# Altium PCB praline.PcbDoc (part 8 of 8)
Units mm, origin at the board's own origin, x right, y up, seen from the top; angles counter-clockwise.
Board outline 152.4 x 101.6 mm, 6 copper layers (In2.Cu, F.Cu, B.Cu, In1.Cu, In3.Cu, In4.Cu); 581 components, 490 nets, 2812 pads, 953 vias.
Unrouted connection lines stored in the file: 404.
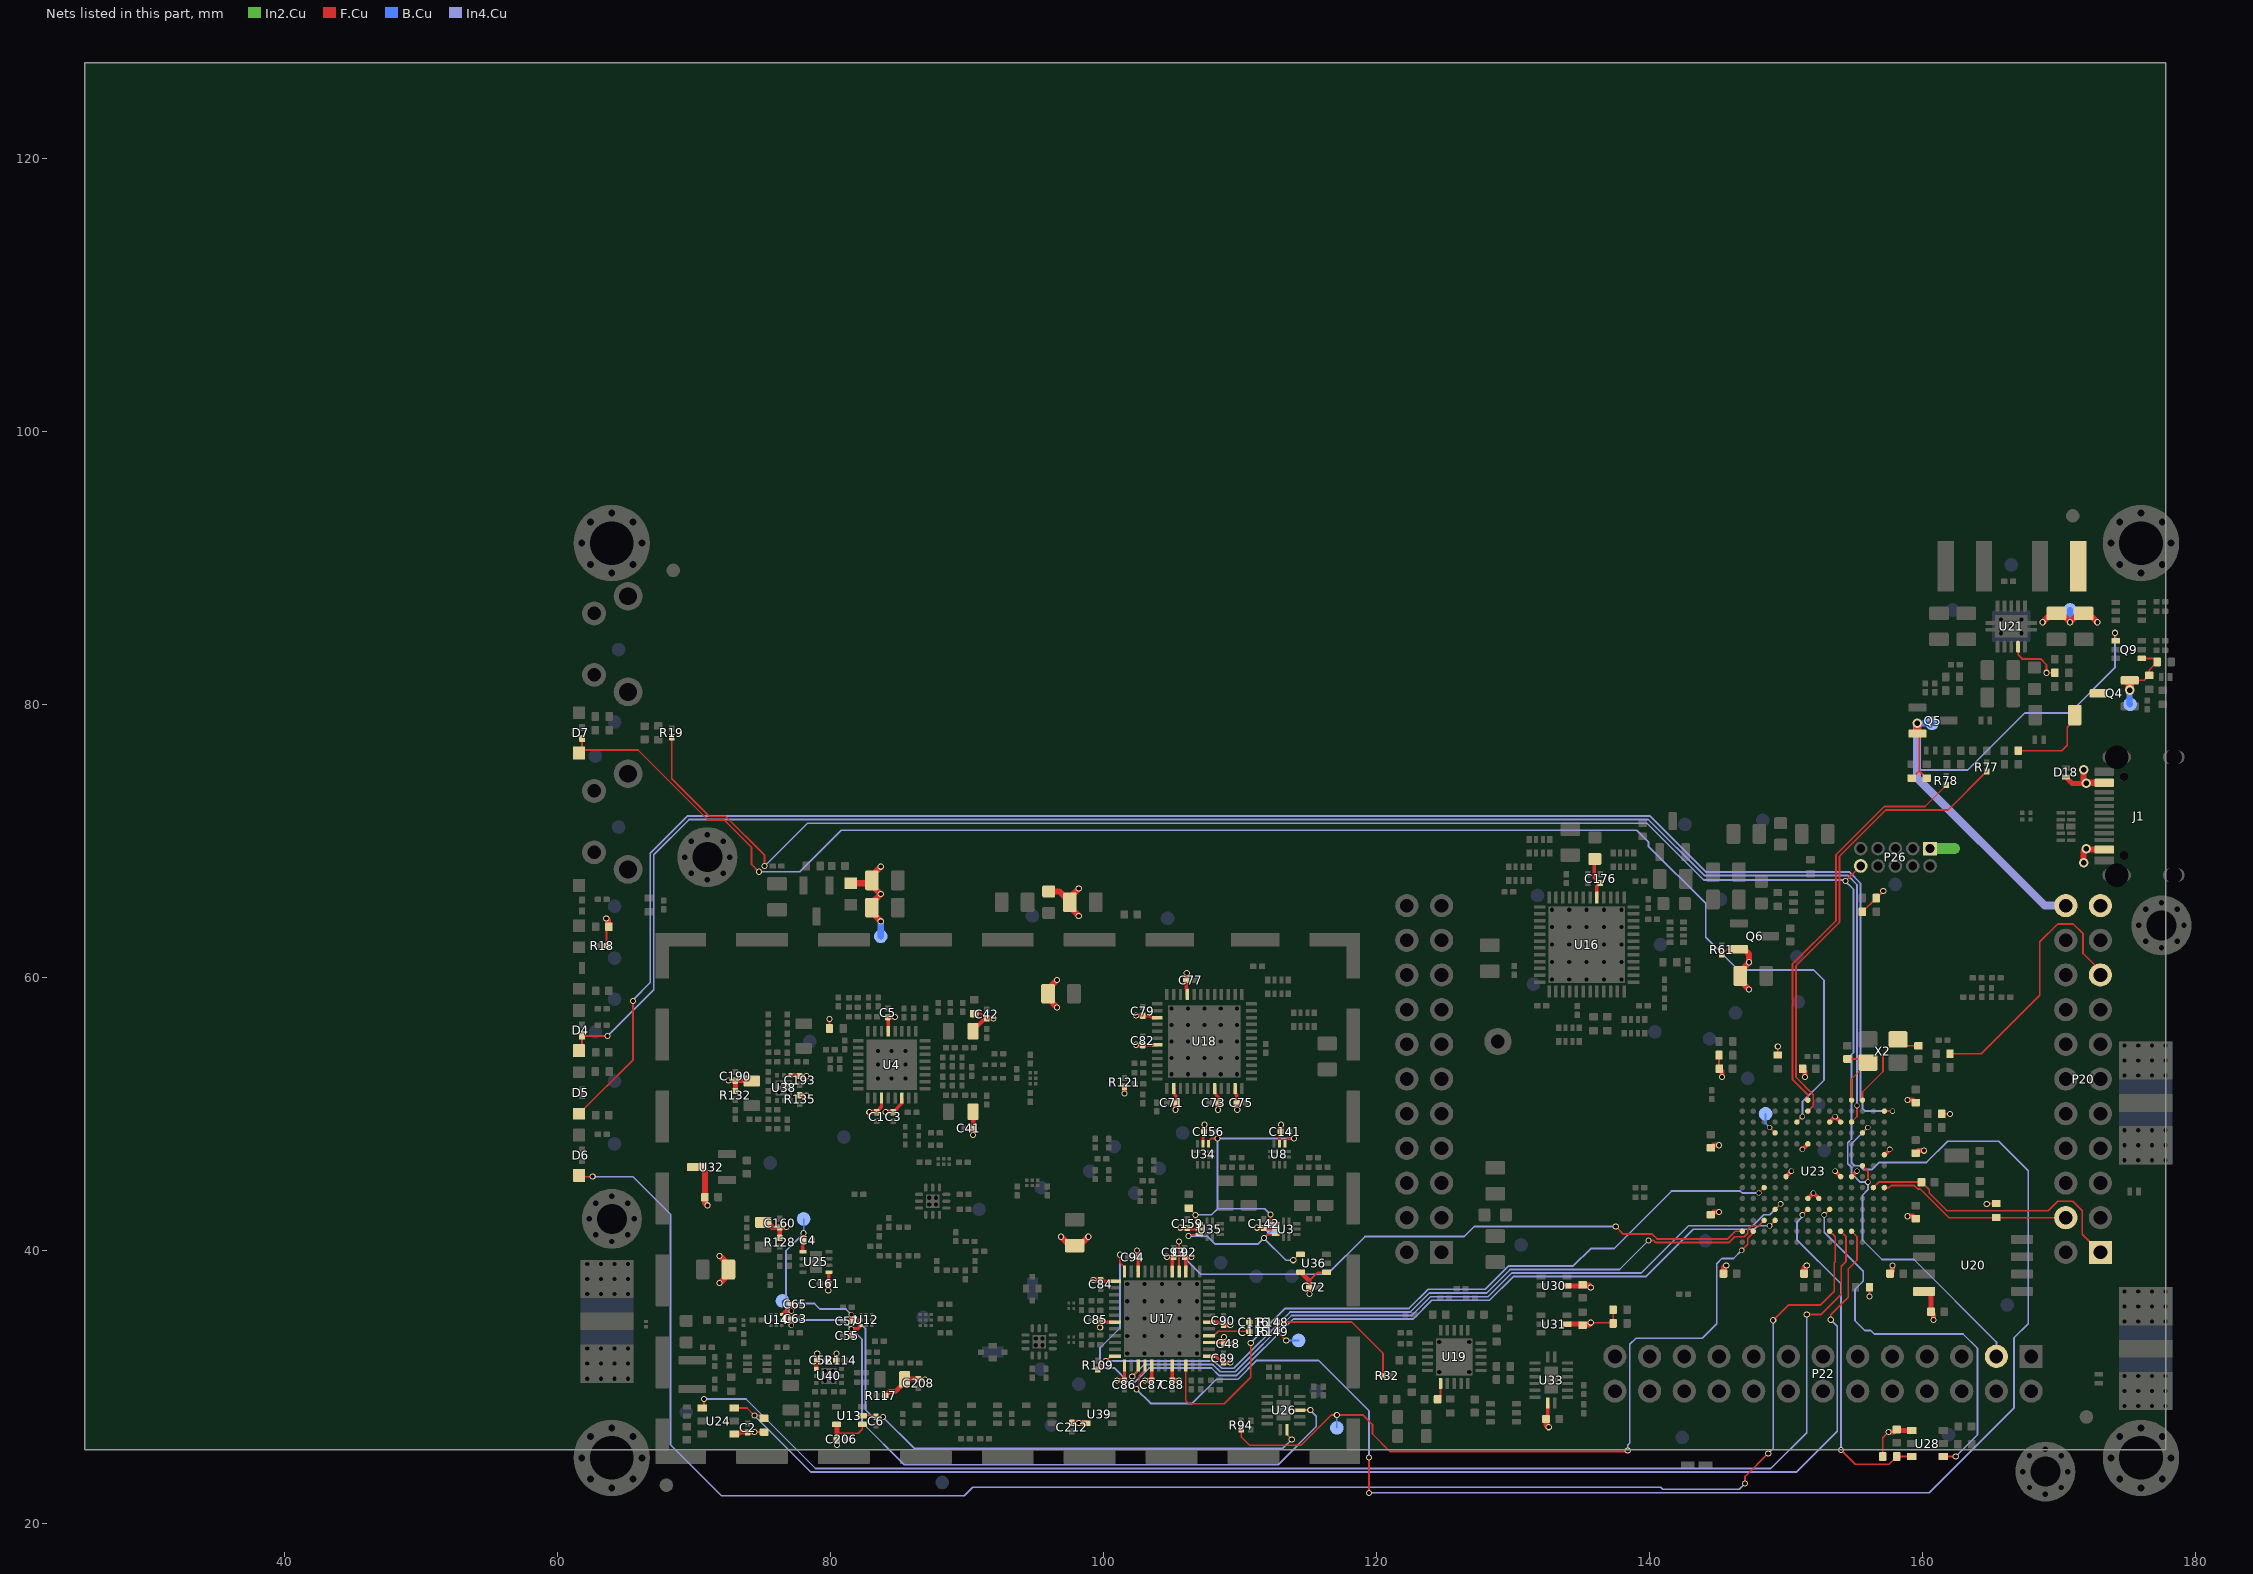
[diagram p10: the nets of this part, all layers, seen from the top]

## Via types
v1: diameter 0.45, hole 0.3, F.Cu to B.Cu, tented both sides, 751 vias
v2: diameter 0.4, hole 0.3, F.Cu to B.Cu, tented both sides, 119 vias
v3: diameter 0.7, hole 0.4, F.Cu to B.Cu, tented both sides, 83 vias

## Nets (pads, with @x,y where several pads share a name; then routed paths per layer and width w, separated by ;. In a path a pad name is that pad's centre, name@x,y a point inside that pad or via, vN(x,y) a via of type N, cw(c..) or ccw(c..) an arc to the next point about the centre after c; other vN are vias at no path point) (continued)
VAA: C1.1 C2.1 C3.1 C5.1 C22.1 C41.1 C42.1 C48.1 C52.1 C71.1 C72.1 C73.1 C75.1 C77.1 C79.1 C82.1 C84.1 C85.1 C86.1 C87.1 C88.1 C89.1 C90.1 C92.1 C93.1 C94.1 C105.1 C141.1 C142.1 C154.1 C156.1 C159.1 C160.1 C161.1 C162.1 C190.1 C193.1 C200.1 C201.1 C204.1 C206.1 C208.1 C212.1 FB3.2 L2.1 L5.1 L26.1 L27.1 L29.1 R5.1 R18.2 R36.2 R114.2 R117.2 R120.1 R121.1 R128.2 R132.2 R135.2 TP4.1 U3.9 U4.5 U4.19 U4.22 U8.9 U13.1 U13.5 U17.1 U17.7 U17.13 U17.17 U17.20 U17.25 U17.27 U17.30 U17.39 U17.41 U17.46 U18.2 U18.8 U18.11 U18.33 U18.39 U18.43 U24.1 U25.1 U32.3 U34.9 U35.9 U36.1 U36.5 U38.1 U39.5 U40.1 | length 89.3
  F.Cu w0.127: R18.2@63.62,62.32 63.62,63.56 C162.1@63.78,63.72 ; v1(74.45,26.72) 75.14,26.72 R36.2@75.15,26.71 ; R120.1@79.94,56.27 79.94,56.96 v1(79.95,56.97) ; 80.48,26.62 82.05,26.62 82.35,26.92 U13.1@82.35,27.27 ; R5.1@90.55,57.36 91.05,57.36 91.41,57 C42.1@91.45,57 ; 115.08,37.79 115.71,38.42 U36.1@116.35,38.42
  F.Cu w0.2: C94.1@102.47,39.52 C94.1@102.57,39.62
  F.Cu w0.203: C159.1@106.15,41.65 106.23,41.57 U35.9@107.032,41.57 ; U34.9@107.3,47.838 C156.1@107.3,48.6 ; C142.1@111.75,41.65 111.83,41.57 U3.9@112.631,41.57 ; U8.9@112.9,47.838 C141.1@112.9,48.6
  F.Cu w0.25: C161.1@79.87,37.57 79.9,37.6 U25.1@79.9,38.42 ; C1.1@83.4,50.14 83.4,50.17 83.75,50.52 U4.19@83.75,51.17 ; C5.1@84.2,57.1 84.25,57.05 U4.5@84.25,56.07 ; C3.1@84.6,50.14 85.25,50.79 U4.22@85.25,51.17 ; C85.1@99.77,34.92 99.92,34.77 U17.7@100.863,34.77 ; C84.1@99.8,37.84 99.87,37.77 U17.1@100.863,37.77 ; C86.1@101.55,30.49 U17.13@101.55,31.582 ; C94.1@102.47,39.52 102.55,39.44 U17.46@102.55,38.457 ; C79.1@102.9,57.2 103.44,57.2 103.57,57.07 U18.39@103.95,57.07 ; C82.1@102.93,55.02 C82.1@102.9,55.05 102.92,55.07 U18.43@103.95,55.07 ; C87.1@103.55,30.49 U17.17@103.55,31.582 ; C88.1@105.05,30.49 U17.20@105.05,31.582 ; U17.41@105.05,38.457 105.05,39.45 C93.1@105.15,39.55 ; U18.2@105.15,51.87 105.15,51.523 105.32,51.353 C71.1@105.32,50.82 ; C92.1@105.95,39.55 106.05,39.45 U17.39@106.05,38.457 ; C77.1@106.08,59.82 106.08,59.21 106.15,59.14 U18.33@106.15,58.77 ; U17.25@107.737,32.27 108.24,32.27 108.71,31.8 C89.1@108.8,31.8 ; U17.27@107.737,33.27 108.73,33.27 C48.1@108.83,33.17 ; U17.30@107.737,34.77 108.48,34.77 108.7,34.55 C90.1@108.8,34.55 ; U18.8@108.15,51.87 108.15,51.52 108.42,51.25 C73.1@108.42,50.82 ; U18.11@109.65,51.87 109.65,51.53 109.78,51.4 C75.1@109.78,50.82
  F.Cu w0.3: U38.1@77.1,52.845 77.695,52.845 C193.1@77.75,52.79 ; U40.1@78.975,31.32 78.975,31.915 C52.1@79.03,31.97 ; L29.1@90.45,50.17 90.47,50.15 C41.1@90.47,48.97 ; L2.1@90.45,56.07 90.45,56.12 91.33,57 C42.1@91.45,57
  F.Cu w0.35: v1@98.25,27.37 U39.5@98.75,27.37 ; v1(102.4,55.08) 102.43,55.05 C82.1@102.9,55.05 ; v1(102.4,57.23) 102.43,57.2 C79.1@102.9,57.2 ; v1(105.29,50.32) 105.32,50.35 C71.1@105.32,50.82 ; C77.1@106.08,59.82 106.08,60.29 v1(106.11,60.32) ; v1(108.39,50.32) 108.42,50.35 C73.1@108.42,50.82 ; C75.1@109.78,50.82 109.78,50.35 v1(109.81,50.32)
  F.Cu w0.364: v1(72.55,52.47) 73.03,52.47 C190.1@73.05,52.45 ; U24.1@72.96,26.57 73.25,26.57 73.38,26.7 C2.1@73.95,26.7 73.97,26.72 v1(74.45,26.72) ; R132.2@73.05,51.69 C190.1@73.05,52.45 ; L27.1@74.25,52.42 74.22,52.45 C190.1@73.05,52.45 ; L26.1@75.1,42.07 75.4,42.07 75.77,41.7 C160.1@76.3,41.7 ; R128.2@76.3,40.94 C160.1@76.3,41.7 ; v1(76.8,41.72) 76.32,41.72 C160.1@76.3,41.7 ; R135.2@77.75,51.39 77.77,51.37 v1(78.25,51.37) ; C193.1@77.75,52.79 77.77,52.77 v1(78.25,52.77) ; C52.1@79.03,31.97 79.05,31.99 v1(79.05,32.47) ; v1(79.85,37.07) 79.85,37.55 C161.1@79.87,37.57 ; R114.2@80.43,31.97 80.45,31.99 v1(80.45,32.47) ; U13.5@80.45,27.27 80.48,27.24 80.48,26.62 C206.1@80.48,26.17 80.5,26.15 v1(80.5,25.77) ; v1(82.86,50.14) C1.1@83.4,50.14 ; R117.2@84.02,29.37 84.32,29.67 84.75,29.67 85.45,30.37 L5.1@85.45,30.57 85.47,30.59 C208.1@86.45,30.59 86.47,30.57 v1(86.95,30.57) ; v1(84.06,50.14) C3.1@84.6,50.14 ; C5.1@84.2,57.1 v1(84.74,57.1) ; v1(90.45,48.47) 90.45,48.95 C41.1@90.47,48.97 ; C42.1@91.45,57 91.47,57.02 v1(91.95,57.02) ; C212.1@97.7,27.39 97.72,27.37 v1(98.2,27.37) ; v1(99.26,37.84) C84.1@99.8,37.84 ; v1(99.77,34.38) C85.1@99.77,34.92 ; v1(101.01,30.49) C86.1@101.55,30.49 ; v1(101.55,51.5) R121.1@101.55,52 ; C94.1@102.47,39.52 v1(102.47,40.02) ; v1(103.05,30.49) C87.1@103.55,30.49 ; v1(104.65,39.55) C93.1@105.15,39.55 ; C88.1@105.05,30.49 v1(105.55,30.49) ; v1(105.65,41.68) 106.12,41.68 C159.1@106.15,41.65 ; C92.1@105.95,39.55 v1(106.45,39.55) ; C156.1@107.38,48.72 107.41,48.75 v1(107.41,49.22) ; C89.1@108.8,31.8 v1(109.3,31.8) ; C90.1@108.8,34.55 v1(109.3,34.55) ; C48.1@108.83,33.17 v1(108.83,33.67) ; v1(111.25,41.68) 111.72,41.68 C142.1@111.75,41.65 ; C141.1@112.98,48.72 113.01,48.75 v1(113.01,49.22) ; U36.5@114.45,38.42 115.08,37.79 C72.1@115.08,37.32 115.11,37.29 v1(115.11,36.82)
  F.Cu w0.45: v1(63.59,64.32) 63.73,64.18 63.73,63.77 C162.1@63.78,63.72 ; U32.3@70.162,46.12 70.56,46.12 70.82,45.86 C22.1@70.82,43.92 70.82,43.5 v1(71,43.32) ; v1(71.9,37.62) 72.55,38.27 C200.1@72.55,38.62 72.55,38.97 v1(71.9,39.62) ; FB3.2@81.5,66.907 82.838,66.907 C105.1@83.05,67.12 ; v1(83.7,64.12) 83.05,64.77 C154.1@83.05,65.12 83.05,65.47 v1(83.7,66.12) 83.05,66.77 C105.1@83.05,67.12 ; v1(83.7,68.12) 83.05,67.47 C105.1@83.05,67.12 ; v1(96.6,57.82) 95.95,58.47 C204.1@95.95,58.82 95.95,59.17 v1(96.6,59.82) ; v1(96.9,41.02) 97.55,40.37 C201.1@97.9,40.37 98.25,40.37 v1(98.9,41.02)
  B.Cu w0.45: TP4.1@83.7,63.02 v1(83.7,64.12)
VBAT: C136.1 P20.1 U23.B9 | length 20.7
  F.Cu w0.127: U23.B9@156.4,44.62 156.8,45.02 C136.1@159.92,45.02 160.484,44.455 160.484,44.225 161.79,42.92 169.2,42.92 169.9,43.62 171,43.62 171.7,42.92 171.7,41.2 P20.1@173.03,39.87
VBUS: D18.1 J1.A4 J1.A9 J1.B4 J1.B9 P20.21 Q4.2 Q9.1 R58.1 R88.1 TP20.1 | length 12.3
  F.Cu w0.127: Q4.2@175.175,81.77 176.24,81.77 R58.1@176.6,82.13 176.6,82.53 R88.1@177.19,83.12 176.94,83.37 Q9.1@176.05,83.37
  F.Cu w0.364: D18.1@170.5,74.67 170.95,74.22 v3(172,74.22)
  F.Cu w0.45: v3(171.8,68.42) 171.8,69.22 v3(172,69.42) 172.05,69.37 J1.B9@173.305,69.37 ; v3(171.8,75.22) 171.8,74.42 v3(172,74.22) 172.05,74.27 J1.B4@173.305,74.27
  F.Cu w0.6: v3(175.17,81.06) 175.175,81.065 Q4.2@175.175,81.77
  B.Cu w0.45: v3(175.17,81.06) 175.17,80.05 TP20.1@175.2,80.02
VBUS_SAFE: D12.2 Q4.3 R62.2 | length 6.2
  F.Cu w0.127: R62.2@167.01,76.62 170.2,76.62 170.6,77.02 170.6,78.32 171.15,78.87 D12.2@171.15,79.22
VBUSCTRL: P20.17 R37.2 | length 19.8
  F.Cu w0.127: R37.2@162.01,54.42 164.3,54.42 168.59,58.71 168.59,62.61 169.9,63.92 171.04,63.92 171.76,63.2 171.76,61.76 173.03,60.49 P20.17@173.03,60.19
VCC: C33.1 C39.1 C40.1 C43.1 C128.1 C129.1 C130.1 C131.1 C132.1 C133.1 C134.1 C135.1 C137.1 C138.1 C144.1 C145.2 C146.2 C165.1 C169.1 FB5.1 L11.1 P26.1 Q6.2 R27.1 R28.1 R38.1 R48.1 R56.1 R59.1 R61.1 R63.2 R64.2 R66.1 R67.2 R100.2 TP19.1 U20.8 U21.4 U23.A6 U23.D8 U23.E3 U23.E8 U23.F3 U23.G10 U23.H5 U23.H10 U23.K8 U28.1 U30.5 U31.5 U33.16 | length 54
  F.Cu w0.127: v1(135.7,34.723) 137.287,34.723 R28.1@137.34,34.67 R27.1@137.34,35.67 ; R67.2@145.09,54.32 145.09,53.35 C128.1@145.12,53.32 ; R61.1@145.3,61.7 145.31,61.7 145.68,62.07 Q6.2@146.562,62.07 ; R64.2@149.4,54.33 v1(149.4,54.95) ; R66.1@155.59,64.82 155.6,64.82 156.6,65.82 R63.2@156.61,65.82 v1(157.12,66.33) ; v1(156.11,36.64) R59.1@156.11,37.32 ; R100.2@157.09,24.92 157.084,24.926 157.084,26.304 v1(157.5,26.72) ; R38.1@161.41,50.02 v1(162,50.02) ; v1(164.7,43.42) 164.73,43.45 R48.1@165.4,43.45 ; U21.4@167,84.22 167,83.63 167.29,83.34 168.65,83.34 169.08,82.91 v1(169.08,82.32) R56.1@169.69,82.32
  F.Cu w0.25: C39.1@132.42,27.67 132.55,27.8 U33.16@132.55,28.833
  F.Cu w0.3: U23.K8@150,45.42 v2(150.4,45.82) ; v2(151.2,47.42) U23.H5@151.6,47.82 ; U23.H10@151.6,43.82 v2(152,44.22) U23.G10@152.4,43.82 ; U23.F3@153.2,49.42 v2(153.6,49.82) U23.E3@154,49.42 ; v2(153.6,45.82) U23.E8@154,45.42 ; U23.D8@154.8,45.42 v2(155.2,45.82) ; U23.A6@157.2,47.02 v2(157.6,47.42)
  F.Cu w0.35: U31.5@133.95,34.62 135.02,34.62 C43.1@135.1,34.54 ; U30.5@133.95,37.42 135.02,37.42 C40.1@135.1,37.5
  F.Cu w0.364: C130.1@144.5,42.64 144.68,42.82 v1(145.1,42.82) ; C129.1@144.5,47.54 144.68,47.72 v1(145.1,47.72) ; C128.1@145.12,53.32 145.3,53.14 v1(145.3,52.72) ; C133.1@151.22,53.32 151.4,53.14 v1(151.4,52.72) ; v1(157.5,26.72) 157.92,26.72 C33.1@158.1,26.9 158.18,26.82 U28.1@159.2,26.82 ; C137.1@157.62,38.32 157.8,38.5 v1(157.8,38.92) ; v1(158.9,42.52) 159.32,42.52 C138.1@159.5,42.34 ; v1(158.9,51.02) 159.32,51.02 C132.1@159.5,50.84 ; C131.1@159.5,47.14 159.68,47.32 v1(160.1,47.32) ; U20.8@160.1,37.015 160.305,37.015 160.62,36.7 C144.1@160.62,35.52 160.8,35.34 v1(160.8,34.92)
  F.Cu w0.45: FB5.1@96,66.307 96.762,66.308 C169.1@97.55,65.52 ; v1(98.2,64.52) 97.55,65.17 C169.1@97.55,65.52 ; v1(98.2,66.52) 97.55,65.87 C169.1@97.55,65.52 ; C39.1@132.42,27.67 132.47,27.62 132.47,27.22 v1(132.62,27.07) ; C43.1@135.1,34.54 135.15,34.59 135.567,34.59 v1(135.7,34.723) ; C40.1@135.1,37.5 135.15,37.45 135.55,37.45 v1(135.7,37.3) ; C134.1@145.42,38.32 145.47,38.37 145.47,38.77 v1(145.62,38.92) ; Q6.2@146.562,62.07 146.95,62.07 147.3,61.72 v1(147.3,61.12) 146.65,60.47 C165.1@146.65,60.12 146.65,59.77 v1(147.3,59.12) ; C135.1@151.32,38.32 151.37,38.37 151.37,38.77 v1(151.52,38.92) ; v1(168.8,86.02) 169.45,86.67 C145.2@169.8,86.67 170.15,86.67 v1(170.8,86.02) 171.45,86.67 C146.2@171.8,86.67 172.15,86.67 v1(172.8,86.02)
  In2.Cu w0.8: P26.1@160.55,69.445 162.325,69.445
  B.Cu w0.45: v1(170.8,86.02) TP19.1@170.8,86.92
VCCPLL: C176.1 FB6.1 U16.29 | length 3.2
  F.Cu w0.25: FB6.1@136,68.732 135.942,68.675 135.942,67.297 136.309,66.93 C176.1@136.4,66.93 136.15,66.68 U16.29@136.15,65.857
VIN: P20.22 Q5.2 Q9.4 R70.1 R90.1 TP21.1 | length 45.7
  F.Cu w0.127: R70.1@159.2,74.61 159.75,75.16 ; Q5.2@159.625,77.87 159.75,77.745 159.75,75.16 ; R90.1@160.3,74.61 159.75,75.16 ; v1(174.09,85.25) 174.15,85.19 Q9.4@174.15,84.67
  F.Cu w0.6: v3(159.6,78.62) 159.625,78.595 Q5.2@159.625,77.87
  In4.Cu w0.127: 159.6,75.2 163.31,75.2 167.49,79.38 170.78,79.38 174.09,82.69 v1(174.09,85.25)
  In4.Cu w0.6: v3(159.6,78.62) 159.6,75.2 159.6,74.62 168.95,65.27 P20.22@170.49,65.27
  B.Cu w0.45: v3(159.6,78.62) TP21.1@160.7,78.62
WAKEUP: P20.4 R48.2 U23.A9 | length 14.3
  F.Cu w0.127: U23.A9@157.2,44.62 157.56,44.62 157.706,44.766 159.384,44.766 159.64,44.51 159.841,44.51 161.941,42.41 P20.4@170.49,42.41
XA: C155.1 U19.1 | length 1.2
  F.Cu w0.127: C155.1@124.48,29.12 124.7,29.34 U19.1@124.7,30.27
XCVR.LD: U17.22 U23.M9 | length 53.2
  F.Cu w0.127: U17.22@106.05,31.582 106.03,31.562 106.03,29.02 106.26,28.79 108.85,28.79 110.8,30.74 v1(110.8,33.24) ; v2(148,44.22) U23.M9@148.4,44.62
  In4.Cu w0.127: v1(110.8,33.24) 113.33,35.77 122.391,35.77 123.791,37.17 127.98,37.17 129.69,38.88 134.42,38.88 135.69,40.15 137.4,40.15 141.61,44.36 146.65,44.36 146.79,44.22 v2(148,44.22)
XCVR.RSSI: U17.16 U23.C4 | length 114.5
  F.Cu w0.127: v1(102.42,29.85) 102.42,29.92 102.63,30.13 102.63,30.85 103.05,31.27 U17.16@103.05,31.582 ; v1(119.46,22.26) v1(119.46,24.85) ; U23.C4@155.6,48.62 v2(156,49.02)
  In4.Cu w0.127: v1(102.42,29.85) 103.46,28.81 106.52,28.81 108.29,30.58 109.86,30.58 111.24,31.96 115.76,31.96 119.46,28.26 v1(119.46,24.85) ; v1(119.46,22.26) 160.5,22.26 166.69,28.45 166.69,33.6 167.74,34.65 167.74,45.86 165.59,48.01 161.84,48.01 160.29,46.46 156.82,46.46 156.31,45.95 155.67,45.95 155.4,46.22 155.044,46.22 154.79,46.474 154.79,47.81 v2(156,49.02)
XCVR.RXHP: U17.40 U23.P13 | length 47
  F.Cu w0.127: U17.40@105.55,38.457 v1(105.55,40.67) ; v1(137.53,41.77) 138.09,41.21 140.2,41.21 140.55,40.86 145.72,40.86 146.28,41.42 U23.P13@146.8,41.42
  In4.Cu w0.127: v1(105.55,40.67) 105.55,39.85 107.13,38.27 116.4,38.27 119.17,41.04 126.44,41.04 127.17,41.77 v1(137.53,41.77)
XCVR.RXTX: U17.48 U23.L12 | length 65.3
  F.Cu w0.127: v1(101.22,39.7) 101.22,39.1 101.55,38.77 U17.48@101.55,38.457 ; v2(148.8,41.82) U23.L12@149.2,42.22
  In4.Cu w0.127: v1(101.22,39.7) 101.22,34.33 99.76,32.87 99.76,31.74 100.09,31.41 100.79,31.41 101.84,30.36 102.31,30.36 103.352,31.402 107.92,31.402 108.462,30.86 109.77,30.86 113.9,34.99 122.689,34.99 124.059,36.36 128.28,36.36 130.02,38.1 139.74,38.1 143.2,41.56 147.68,41.56 147.94,41.82 v2(148.8,41.82)
XCVR.{\C\S\}\: U17.15 U23.L11 | length 54.7
  F.Cu w0.127: v1(102.12,30.79) 102.55,31.22 U17.15@102.55,31.582 ; U23.L11@149.2,43.02 v2(149.6,43.42)
  In4.Cu w0.127: v1(102.12,30.79) 102.986,31.656 108.025,31.656 108.561,31.12 109.65,31.12 113.78,35.25 122.59,35.25 123.96,36.62 128.17,36.62 129.91,38.36 139.4,38.36 142.86,41.82 147.56,41.82 148.36,42.62 148.8,42.62 v2(149.6,43.42)
XCVR.{\S\H\D\N\}\: R109.1 U17.12 U23.M12 | length 54.9
  F.Cu w0.127: R109.1@99.6,31.3 99.61,31.3 100.18,31.87 v1(100.18,31.91) 100.54,32.27 U17.12@100.863,32.27 ; v1(139.93,40.745) 139.935,40.74 140.31,40.74 140.46,40.59 145.81,40.59 146.24,41.02 146.952,41.02 147.2,41.268 147.2,41.572 147.448,41.82 148,41.82 U23.M12@148.4,42.22
  In4.Cu w0.127: v1(100.18,31.91) 108.13,31.91 108.66,31.38 109.55,31.38 113.68,35.51 122.49,35.51 123.88,36.9 128.07,36.9 129.79,38.62 137.805,38.62 v1(139.93,40.745)
XCVR_CLK: R32.1 R148.1 R149.2 TP33.1 | length 12.9
  F.Cu w0.127: v1(113.4,33.42) 112.75,34.07 R149.2@112.72,34.07 R148.1@112.72,34.77 118.2,34.77 120.48,32.49 R32.1@120.48,30.82
  B.Cu w0.127: v1(113.4,33.42) TP33.1@114.3,33.42
XTAL: C115.2 C116.1 U17.28 | length 3.8
  F.Cu w0.127: U17.28@107.737,33.77 108.09,33.77 108.42,34.1 110.65,34.1 C115.2@110.68,34.07 C116.1@110.68,34.77
XTAL1: C157.1 U23.C1 X2.1 | length 7.2
  F.Cu w0.127: U23.C1@155.6,51.02 155.6,51.62 157.1,53.12 157.1,54.42 158.05,55.37 158.2,55.37 158.57,55 C157.1@159.7,55
XTAL2: C158.1 U23.D1 X2.3 | length 4.9
  F.Cu w0.127: C158.1@154.5,54.04 155.63,54.04 X2.3@156,53.67 ; U23.D1@154.8,51.02 154.8,52.57 X2.3@156,53.77
{\3\V\3\A\U\X\_\E\N\}\: R100.1 U23.H11 U28.3 | length 25.1
  F.Cu w0.127: v2(151.2,42.62) U23.H11@151.6,43.02 ; v1(154.02,25.41) 155.08,24.35 157.54,24.35 R100.1@158.11,24.92 U28.3@159.2,24.92
  In4.Cu w0.127: v2(151.2,42.62) 151.2,42.48 150.8,42.08 150.8,40.81 154.02,37.59 v1(154.02,25.41)
{\3\V\3\A\U\X\_\O\C\}\: U23.F11 U28.4 | length 29
  F.Cu w0.127: v2(152.8,42.62) U23.F11@153.2,43.02 ; U28.4@161.52,24.92 v1(162.43,24.92)
  In4.Cu w0.127: v2(152.8,42.62) 152.8,41.341 155.66,38.481 155.66,37.781 155.054,37.175 155.054,34.876 155.78,34.15 156.2,34.15 156.456,33.894 162.966,33.894 164.02,32.84 164.02,26.51 v1(162.43,24.92)
{\A\A\_\E\N\}\: TP54.1 U3.10 U35.10 U36.4 | length 12.3
  F.Cu w0.127: v1(106.24,41.06) 106.35,41.17 U35.10@107.032,41.17 ; v1(111.76,40.92) 112.01,41.17 U3.10@112.631,41.17 ; v1(113.91,39.3) 114.33,39.72 U36.4@114.45,39.72
  In4.Cu w0.127: v1(106.24,41.06) 107.62,41.06 108.2,40.48 111.32,40.48 v1(111.76,40.92) 113.38,39.3 v1(113.91,39.3)
  B.Cu w0.127: v1(111.76,40.92) 112.4,41.56 TP54.1@112.4,41.62
{\B\B\_\E\N\}\: R113.1 U3.8 U8.8 U34.8 U35.8 | length 21.1
  F.Cu w0.127: R113.1@106.25,43.11 106.26,43.11 v1(106.75,42.62) 106.75,42.12 106.9,41.97 U35.8@107.032,41.97 U35.8@106.85,41.97 ; U34.8@107.7,47.838 107.7,48 107.92,48.22 v1(108.37,48.22) ; v1(112.25,42.64) 112.25,42.18 112.46,41.97 U3.8@112.631,41.97 ; U8.8@113.3,47.838 113.3,48 113.52,48.22 v1(113.97,48.22)
  In4.Cu w0.127: v1(106.75,42.62) 107.92,42.62 108.37,43.07 ; v1(112.25,42.64) 111.82,43.07 108.37,43.07 ; v1(113.97,48.22) v1(108.37,48.22) 108.37,43.07
{\B\I\A\S\_\E\N\}\: R36.1 U23.D13 U24.3 | length 100.6
  F.Cu w0.127: U24.3@72.96,28.47 73.9,28.47 v1(74.45,27.92) 74.96,27.92 R36.1@75.15,27.73 ; v1(153.28,34.94) 153.28,35.31 154.554,36.584 154.554,38.654 155.2,39.3 155.2,41.02 U23.D13@154.8,41.42
  In4.Cu w0.127: v1(74.45,27.92) 78.59,23.78 150.76,23.78 153.76,26.78 153.76,34.46 v1(153.28,34.94)
{\B\I\A\S\_\O\C\}\: U23.E13 U24.4 | length 101.4
  F.Cu w0.127: U24.4@70.64,28.47 70.75,28.58 v1(70.75,29.13) ; v1(151.52,35.33) 152.57,35.33 154.038,36.798 154.038,38.858 154.4,39.22 154.4,41.02 U23.E13@154,41.42
  In4.Cu w0.127: v1(70.75,29.13) 73.83,29.13 78.92,24.04 148.889,24.04 151.52,26.671 v1(151.52,35.33)
{\L\E\D\1\}\: D4.2 D4.4 U23.D3 | length 126.4
  F.Cu w0.127: D4.4@61.6,54.651 61.82,54.871 D4.2@61.82,55.726 63.686,55.726 v1(63.69,55.73) ; U23.D3@154.8,49.42 155.2,49.82 v2(155.2,50.62)
  In4.Cu w0.127: v1(63.69,55.73) 67.074,59.114 67.074,68.994 69.66,71.58 139.91,71.58 144.01,67.48 154.52,67.48 155.2,66.8 v2(155.2,50.62)
{\L\E\D\2\}\: D5.1 U23.A2 | length 132.5
  F.Cu w0.127: D5.1@61.6,50.029 65.56,53.989 v1(65.56,58.28) ; U23.A2@157.2,50.22 v2(157.8,50.22)
  In4.Cu w0.127: v1(65.56,58.28) 65.56,58.38 66.82,59.64 66.82,69.11 69.55,71.84 140.02,71.84 144.12,67.74 154.62,67.74 155.454,66.906 155.454,50.936 155.6,50.79 155.6,50.41 155.79,50.22 v2(157.8,50.22)
{\L\E\D\3\}\: D6.4 U23.F13 | length 128.3
  F.Cu w0.127: D6.4@61.6,45.507 61.687,45.42 v1(62.6,45.42) ; v1(147,22.94) 147,23.45 v1(148.7,25.15) ; v1(149.06,34.9) 150.17,36.01 152.51,36.01 153.53,37.03 153.53,39.126 153.6,39.196 153.6,41.02 U23.F13@153.2,41.42
  In4.Cu w0.127: v1(62.6,45.42) 65.55,45.42 68.3,42.67 68.3,25.78 72.03,22.05 89.81,22.05 90.44,22.68 140.82,22.68 140.98,22.52 146.58,22.52 v1(147,22.94) ; v1(148.7,25.15) 149.06,25.51 v1(149.06,34.9)
{\L\E\D\4\}\: D7.2 D7.4 U23.J3 | length 115.8
  F.Cu w0.127: D7.4@61.27,76.67 65.92,76.67 71.05,71.54 72.23,71.54 74.24,69.53 74.24,68.28 v1(74.77,67.75) ; D7.4@61.6,76.445 61.82,76.665 D7.2@61.82,77.52 ; U23.J3@150.8,49.42 v2(151.2,49.82)
  In4.Cu w0.127: v1(74.77,67.75) 77.775,67.75 80.815,70.79 139.08,70.79 139.92,69.95 139.92,69.63 144.12,65.43 144.12,62.94 146.51,60.55 152.02,60.55 152.78,59.79 152.78,52.48 151.2,50.9 v2(151.2,49.82)
{\M\I\X\_\E\N\}\: R94.1 TP44.1 U23.N13 | length 55.7
  F.Cu w0.127: R94.1@110.1,26.9 110.1,26.35 110.71,25.74 114.48,25.74 116.71,27.97 119,27.97 119.71,27.26 119.71,26.57 120.99,25.29 138.34,25.29 v1(138.41,25.36) ; v2(146.75,40.02) 146.76,40.02 147.2,40.46 147.2,40.9 147.6,41.3 U23.N13@147.6,41.42
  In4.Cu w0.127: v1(138.41,25.36) 138.41,25.76 138.56,25.91 138.56,33.14 139.01,33.59 143.861,33.59 144.92,34.649 144.92,39.04 145.3,39.42 146.15,39.42 v2(146.75,40.02)
  B.Cu w0.127: TP44.1@117.1,27.02 v1(117.1,27.97)
{\R\E\S\E\T\}\: P22.3 P26.10 R19.1 U23.C7 | length 139.9
  F.Cu w0.127: R19.1@68.4,77.6 68.4,74.56 71.14,71.82 72.33,71.82 75.19,68.96 v1(75.19,68.17) ; v1(154.35,67.06) 155.465,68.175 P26.10@155.47,68.175 ; U23.C7@155.6,46.22 156,45.82 v2(156,45.02)
  In4.Cu w0.127: v1(75.19,68.17) 78.33,71.31 139.82,71.31 143.98,67.15 154.26,67.15 v1(154.35,67.06) 154.94,66.47 154.94,54.501 154.8,54.361 154.8,48.179 154.53,47.909 154.53,46.374 154.8,46.104 154.8,45.664 155.444,45.02 v2(156,45.02) 156,44.46 155.6,44.06 155.6,40.779 157.029,39.35 159.37,39.35 165.41,33.31 P22.3@165.41,32.25
{\R\X\_\A\M\P\_\E\N\}\: C6.2 C57.2 C65.2 TP41.1 U12.8 U13.2 U14.1 U26.8 | length 51
  F.Cu w0.127: U13.2@82.35,27.92 C6.2@83.33,27.92 ; C6.2@83.33,27.82 C6.2@83.35,27.84 83.37,27.82 v1(83.85,27.82) ; U26.8@113.45,26.882 113.45,26.52 v1(113.8,26.17)
  F.Cu w0.25: U14.1@76.45,35.32 76.7,35.57 v2(77.15,35.57) ; C57.2@81.57,34.82 81.67,34.92 U12.8@82.25,34.92
  F.Cu w0.364: C65.2@77.13,36.07 77.15,36.05 v2(77.15,35.57) ; v2(81.55,35.32) 81.55,34.84 C57.2@81.57,34.82
  In4.Cu w0.127: v2(77.15,35.57) 77.7,36.12 78.85,36.12 79.25,35.72 81.15,35.72 v2(81.55,35.32) 82.58,34.29 82.58,28.35 83.11,27.82 v1(83.85,27.82) 86.15,25.52 113.15,25.52 v1(113.8,26.17)
  B.Cu w0.127: TP41.1@76.5,36.32 76.5,36.22 v2(77.15,35.57)
{\T\R\S\T\}\: TP5.1 U23.L4 | length 1.7
  F.Cu w0.127: v2(148.8,49.02) U23.L4@149.2,48.62
  B.Cu w0.127: TP5.1@148.5,50.02 148.5,49.32 v2(148.8,49.02)
{\T\X\_\A\M\P\_\E\N\}\: C4.2 C55.2 C63.2 TP42.1 U12.1 U14.8 U25.5 U26.11 | length 62.3
  F.Cu w0.127: U26.11@114.388,28.32 v1(115.16,28.32)
  F.Cu w0.25: U14.8@76.45,34.92 77.03,34.92 C63.2@77.13,35.02 ; U25.5@78,39.92 78,40.74 C4.2@78.03,40.77 ; v2(81.55,34.27) 82,34.27 U12.1@82.25,34.52
  F.Cu w0.364: C63.2@77.13,35.02 77.15,35 v2(77.15,34.52) ; C4.2@78.03,40.77 78.05,40.79 v1(78.05,41.27) ; v2(81.55,34.27) 81.55,33.79 C55.2@81.57,33.77
  In4.Cu w0.127: v1(78.05,41.27) 76.75,39.97 76.75,34.92 v2(77.15,34.52) 77.55,34.92 80.9,34.92 v2(81.55,34.27) 82.32,33.5 82.32,27.41 85.41,24.32 112.8,24.32 115.6,27.12 115.6,27.88 v1(115.16,28.32)
  B.Cu w0.127: v1(78.05,41.27) TP42.1@78.05,42.32
{\V\B\U\S\_\I\N\_\E\N\}\: R77.2 U23.H2 | length 34
  F.Cu w0.127: U23.H2@151.6,50.22 152,50.62 152,51.42 150.73,52.69 150.73,60.87 153.92,64.06 153.92,68.89 157.3,72.27 161.87,72.27 R77.2@164.7,75.1
{\V\I\N\_\I\N\_\E\N\}\: R78.2 U23.H1 | length 30
  F.Cu w0.127: U23.H1@151.6,51.02 151.6,51.42 150.47,52.55 150.47,60.97 153.66,64.16 153.66,69 157.19,72.53 160.18,72.53 R78.2@161.75,74.1
pads on no net: C1.Un1 C1.Un2 C2.Un1 C2.Un2 C3.Un1 C3.Un2 C4.Un1 C4.Un2 C5.Un1 C5.Un2 C6.Un1 C6.Un2 C7.Un1 C7.Un2 C8.Un1 C8.Un2 C9.Un1 C9.Un2 C10.Un1 C10.Un2 C11.Un1 C11.Un2 C12.Un1 C12.Un2 C13.Un1 C13.Un2 C14.Un1 C14.Un2 C15.Un1 C15.Un2 C16.Un1 C16.Un2 C17.Un1 C17.Un2 C18.Un1 C18.Un2 C19.Un1 C19.Un2 C20.Un1 C20.Un2 C21.Un1 C21.Un2 C24.Un1 C24.Un2 C25.Un1 C25.Un2 C26.Un1 C26.Un2 C27.Un1 C27.Un2 C28.Un1 C28.Un2 C29.Un1 C29.Un2 C30.Un1 C30.Un2 C31.Un1 C31.Un2 C34.Un1 C34.Un2 C35.Un1 C35.Un2 C36.Un1 C36.Un2 C37.Un1 C37.Un2 C41.Un1 C41.Un2 C42.Un1 C42.Un2 C44.Un1 C44.Un2 C45.Un1 C45.Un2 C46.Un1 C46.Un2 C47.Un1 C47.Un2 C48.Un1 C48.Un2 C49.Un1 C49.Un2 C50.Un1 C50.Un2 C51.Un1 C51.Un2 C52.Un1 C52.Un2 C53.Un1 C53.Un2 C54.Un1 C54.Un2 C55.Un1 C55.Un2 C56.Un1 C56.Un2 C57.Un1 C57.Un2 C58.Un1 C58.Un2 C59.Un1 C59.Un2 C60.Un1 C60.Un2 C61.Un1 C61.Un2 C62.Un1 C62.Un2 C63.Un1 C63.Un2 C65.Un1 C65.Un2 C66.Un1 C66.Un2 C67.Un1 C67.Un2 C68.Un1 C68.Un2 C69.Un1 C69.Un2 C70.Un1 C70.Un2 C71.Un1 C71.Un2 C72.Un1 C72.Un2 C73.Un1 C73.Un2 C74.Un1 C74.Un2 C75.Un1 C75.Un2 C76.Un1 C76.Un2 C77.Un1 C77.Un2 C78.Un1 C78.Un2 C79.Un1 C79.Un2 C82.Un1 C82.Un2 C83.Un1 C83.Un2 C84.Un1 C84.Un2 C85.Un1 C85.Un2 C86.Un1 C86.Un2 C87.Un1 C87.Un2 C88.Un1 C88.Un2 C89.Un1 C89.Un2 C90.Un1 C90.Un2 C91.Un1 C91.Un2 C92.Un1 C92.Un2 C93.Un1 C93.Un2 C94.Un1 C94.Un2 C95.Un1 C95.Un2 C96.Un1 C96.Un2 C97.Un1 C97.Un2 C98.Un1 C98.Un2 C99.Un1 C99.Un2 C100.Un1 C100.Un2 C101.Un1 C101.Un2 C102.Un1 C102.Un2 C103.Un1 C103.Un2 C104.Un1 C104.Un2 C106.Un1 C106.Un2 C107.Un1 C107.Un2 C108.Un1 C108.Un2 C109.Un1 C109.Un2 C111.Un1 C111.Un2 C112.Un1 C112.Un2 C114.Un1 C114.Un2 C115.Un1 C115.Un2 C116.Un1 C116.Un2 C123.Un1 C123.Un2 C125.Un1 C125.Un2 C139.Un1 C139.Un2 C141.Un1 C141.Un2 C142.Un1 C142.Un2 C148.Un1 C148.Un2 C149.Un1 C149.Un2 C150.Un1 C150.Un2 C151.Un1 C151.Un2 C152.Un1 C152.Un2 C156.Un1 C156.Un2 C159.Un1 C159.Un2 C160.Un1 C160.Un2 C161.Un1 C161.Un2 C174.Un1 C174.Un2 C176.Un1 C176.Un2 C177.Un1 C177.Un2 C178.Un1 C178.Un2 C179.Un1 C179.Un2 C183.Un1 C183.Un2 C185.Un1 C185.Un2 C187.Un1 C187.Un2 C188.Un1 C188.Un2 C189.Un1 C189.Un2 C190.Un1 C190.Un2 C191.Un1 C191.Un2 C192.Un1 C192.Un2 C193.Un1 C193.Un2 C194.Un1 C194.Un2 C195.Un1 C195.Un2 C196.Un1 C196.Un2 C198.Un1 C198.Un2 C202.Un1 C202.Un2 C203.Un1 C203.Un2 C205.Un1 C205.Un2 C206.Un1 C206.Un2 C207.Un1 C207.Un2 C208.Un1 C208.Un2 C209.Un1 C209.Un2 C210.Un1 C210.Un2 C211.Un1 C211.Un2 C212.Un1 C212.Un2 D1.Un1 D1.Un2 D2.Un1 D3.Un1 D3.Un2 D5.Un1 D9.Un1 D9.Un2 D10.Un1 D10.Un2 D11.Un1 D11.Un2 D13.Un1 D13.Un2 D14.Un1 D14.Un2 D15.Un1 D15.Un2 D16.Un1 D16.Un2 D17.Un1 D17.Un2 D18.Un1 D18.Un2 FID1.Un1 FID2.Un1 FID3.Un1 FID4.Un1 J1.Un1 J1.Un2 L1.Un1 L1.Un2 L3.Un1 L3.Un2 L6.Un1 L6.Un2 L7.Un1 L7.Un2 L8.Un1 L8.Un2 L9.Un1 L9.Un2 L12.Un1 L12.Un2 L14.Un1 L14.Un2 L15.Un1 L15.Un2 L16.Un1 L16.Un2 L17.Un1 L17.Un2 L18.Un1 L18.Un2 L28.Un1 L28.Un2 L30.Un1 L30.Un2 L31.Un1 L31.Un2 L32.Un1 L32.Un2 L34.Un1 L34.Un2 R1.Un1 R1.Un2 R2.Un1 R2.Un2 R3.Un1 R3.Un2 R4.Un1 R4.Un2 R6.Un1 R6.Un2 R8.Un1 R8.Un2 R9.Un1 R9.Un2 R10.Un1 R10.Un2 R11.Un1 R11.Un2 R12.Un1 R12.Un2 R13.Un1 R13.Un2 R14.Un1 R14.Un2 R15.Un1 R15.Un2 R16.Un1 R16.Un2 R17.Un1 R17.Un2 R18.Un1 R18.Un2 R19.Un1 R19.Un2 R21.Un1 R21.Un2 R22.Un1 R22.Un2 R23.Un1 R23.Un2 R24.Un1 R24.Un2 R25.Un1 R25.Un2 R26.Un1 R26.Un2 R29.Un1 R29.Un2 R30.Un1 R30.Un2 R31.Un1 R31.Un2 R32.Un1 R32.Un2 R33.Un1 R33.Un2 R34.Un1 R34.Un2 R35.Un1 R35.Un2 R41.Un1 R41.Un2 R42.Un1 R42.Un2 R43.Un1 R43.Un2 R51.Un1 R51.Un2 R54.Un1 R54.Un2 R57.Un1 R57.Un2 R61.Un1 R61.Un2 R69.Un1 R69.Un2 R72.Un1 R72.Un2 R74.Un1 R74.Un2 R76.Un1 R76.Un2 R77.Un1 R77.Un2 R78.Un1 R78.Un2 R81.Un1 R81.Un2 R83.Un1 R83.Un2 R84.Un1 R84.Un2 R86.Un1 R86.Un2 R87.Un1 R87.Un2 R92.Un1 R92.Un2 R94.Un1 R94.Un2 R95.Un1 R95.Un2 R96.Un1 R96.Un2 R97.Un1 R97.Un2 R98.Un1 R98.Un2 R99.Un1 R99.Un2 R102.Un1 R102.Un2 R103.Un1 R103.Un2 R106.Un1 R106.Un2 R107.Un1 R107.Un2 R108.Un1 R108.Un2 R109.Un1 R109.Un2 R110.Un1 R110.Un2 R111.Un1 R111.Un2 R112.Un1 R112.Un2 R114.Un1 R114.Un2 R115.Un1 R115.Un2 R116.Un1 R116.Un2 R117.Un1 R117.Un2 R118.Un1 R118.Un2 R119.Un1 R119.Un2 R121.Un1 R121.Un2 R122.Un1 R122.Un2 R123.Un1 R123.Un2 R124.Un1 R124.Un2 R125.Un1 R125.Un2 R126.Un1 R126.Un2 R127.Un1 R127.Un2 R128.Un1 R128.Un2 R129.Un1 R129.Un2 R130.Un1 R130.Un2 R131.Un1 R131.Un2 R132.Un1 R132.Un2 R133.Un1 R133.Un2 R134.Un1 R134.Un2 R135.Un1 R135.Un2 R136.Un1 R136.Un2 R137.Un1 R137.Un2 R138.Un1 R138.Un2 R139.Un1 R139.Un2 R140.Un1 R140.Un2 R141.Un1 R141.Un2 R142.Un1 R142.Un2 R143.Un1 R143.Un2 R144.Un1 R144.Un2 R145.Un1 R145.Un2 R146.Un1 R146.Un2 R147.Un1 R147.Un2 R148.Un1 R148.Un2 R149.Un1 R149.Un2 R150.Un1 R150.Un2 R151.Un1 R151.Un2 R152.Un1 R152.Un2 R153.Un1 R153.Un2 R154.Un1 R154.Un2 R155.Un1 R155.Un2 R156.Un1 R156.Un2 R157.Un1 R157.Un2 T1.5 T1.6 T2.5 T2.6 U4.Un1 U4.Un2 U4.Un3 U4.Un4 U4.Un5 U4.Un6 U4.Un7 U4.Un8 U4.Un9 U4.Un10 U4.Un11 U4.Un12 U4.Un13 U4.Un14 U4.Un15 U4.Un16 U16.Un1 U16.Un2 U16.Un3 U16.Un4 U16.Un5 U16.Un6 U16.Un7 U16.Un8 U16.Un9 U16.Un10 U16.Un11 U16.Un12 U16.Un13 U16.Un14 U16.Un15 U16.Un16 U17.Un1 U17.Un2 U17.Un3 U17.Un4 U17.Un5 U17.Un6 U17.Un7 U17.Un8 U17.Un9 U17.Un10 U17.Un11 U17.Un12 U17.Un13 U17.Un14 U17.Un15 U17.Un16 U18.Un1 U18.Un2 U18.Un3 U18.Un4 U18.Un5 U18.Un6 U18.Un7 U18.Un8 U18.Un9 U18.Un10 U18.Un11 U18.Un12 U18.Un13 U18.Un14 U18.Un15 U18.Un16 U19.Un1 U19.Un2 U19.Un3 U19.Un4 U25.Un1 U25.Un2 U26.15 U26.Un1 U33.17 U33.Un1 U33.Un2

## Polygon pours and split planes (outlines as drawn)
GND on F.Cu "F.Cu-GND" (solid, remove dead copper, pour order 23): 164.1,79.62 159.9,84.12 159.9,86.52 173.1,86.52 173.1,84.02 167.3,79.62
VBUS_SAFE on F.Cu "F.Cu-/Microcontroller/VBUS_SAFE" (solid, remove dead copper, pour order 27): 169.9,80.82 171.5,80.82 171.5,82.32 173.5,82.32 173.5,77.22 169.9,77.22
+1V2 on F.Cu "F.Cu-+1V2" (solid, remove dead copper, pour order 20): 164.5,85.72 159.9,85.72 159.9,92.22 164.5,92.22
Net-(D11-K) on F.Cu "F.Cu-Net-(D11-K)" (solid, remove dead copper, pour order 26): 164.8,79.42 165.9,79.42 165.9,81.52 168.8,81.52 168.8,80.82 169.5,80.82 169.5,78.02 168.4,78.02 168.4,77.12 164.8,77.12
VCC on F.Cu "F.Cu-VCC-1" (solid, remove dead copper, pour order 25): 150,47.82 154,47.82 154,43.82 150,43.82
VCC on F.Cu "F.Cu-VCC" (solid, remove dead copper, pour order 22): 168.5,85.72 168.5,92.22 173.1,92.22 173.1,85.72
Net-(D13-A) on F.Cu "F.Cu-Net-(D13-A)" (solid, remove dead copper, pour order 24): 164.4,79.42 163.8,79.42 162.8,80.42 161.3,80.42 161.3,77.22 164.4,77.22
GND on B.Cu "B.Cu-GND" (solid, remove dead copper, pour order 29): 60,95.82 60,20.82 180,20.82 180,95.82
GND on In1.Cu "In1.Cu-GND" (solid, remove dead copper, pour order 30): 60,95.82 60,20.82 180,20.82 180,95.82
GND on In3.Cu "In3.Cu-GND" (solid, remove dead copper, pour order 31): 60,95.82 60,20.82 180,20.82 180,95.82
3V3FPGA on In2.Cu "In2.Cu-3V3FPGA" (solid, remove dead copper, pour order 17): 151.4,69.22 144.7,58.82 131.8,43.72 126.5,43.72 126.5,41.32 120,41.33 117.9,45.52 106.8,62.32 101.2,63.62 101.2,65.02 144.809,69.22
3V3CLK on In2.Cu "In2.Cu-3V3CLK" (solid, remove dead copper, pour order 15): 130.3,41.22 130.3,25.92 120.4,25.92 120.3,41.22
1V2FPGA on In2.Cu "In2.Cu-1V2FPGA" (solid, remove dead copper, pour order 21): 144.809,69.22 147.8,69.22 147.8,71.82 133.7,71.82 133.7,57.02 139.5,58.22 139.4,64.12 140.1,67.22
3V3LED on In2.Cu "In2.Cu-3V3LED" (solid, remove dead copper, pour order 13): 64.5,48.82 64.5,60.62 62.6,64.02 62.6,66.02 77.3,66.02 83.4,69.32 94.1,64.12 94.1,94.82 61,94.82 61,48.82
GND on In2.Cu "In2.Cu-GND" (solid, remove dead copper, pour order 12): 180,77.62 172.1,77.62 168.7,74.52 168.7,69.12 172.1,66.12 180,66.12
+1V2 on In2.Cu "In2.Cu-+1V2" (solid, remove dead copper, pour order 19): 164.8,70.72 164.8,87.32 160,87.224 159.895,71.82 151.4,71.82 151.4,69.22
3V3AUX on In2.Cu "In2.Cu-3V3AUX" (solid, remove dead copper, pour order 18): 178,21.82 178,44.22 171.2,44.22 157.5,26.02 156.9,26.62 156.9,34.02 153.6,34.02 132.88,26.67 120.99,26.66 121,33.22 126.5,38.22 126.5,41.72 117.6,41.33 117.6,21.82
VAA on In2.Cu "In2.Cu-VAA" (solid, remove dead copper, pour order 14): 67.6,60.52 67.6,21.82 116.6,21.82 116.5,45.82 106.6,61.12 94,62.62 83.7,68.02 77.75,64.62 63.3,64.62 63.3,64.22
VCC on In2.Cu "In2.Cu-VCC" (solid, remove dead copper, pour order 32): 178,21.82 178,94.82 97.8,94.82 97.8,64.317 101.2,63.62 134,21.82
2V5RF on In4.Cu "In4.Cu-2V5RF" (solid, remove dead copper, pour order 28): 69.55,46.82 89.45,56.52 94.98,54.91 94.904,42.324 89.8,37.22 89.8,31.72 114.2,31.72 109.729,25.72 85.734,25.72 82.1,29.42 82.15,33.62 78.15,35.12 75.95,29.02 74.35,29.02 74.65,35.12
VBUS on In4.Cu "In4.Cu-/Power/VBUS" (solid, remove dead copper, pour order 16): 177.4,81.72 174.6,81.62 175.3,76.72 175.3,75.42 171.5,75.42 169.9,73.22 169.9,71.02 171.5,68.22 175.3,68.92 175.3,66.82 171.5,66.77 171.5,63.82 177.4,63.82

## Keep-outs
F.Cu:
  region: 168,93.32 161,93.32 161,95.82 168,95.82
  region: 128,29.92 123.4,29.92 123.4,34.52 128,34.52
In1.Cu:
  region: 74.56,34.61 71.65,34.61 71.65,35.23 74.56,35.23
  region: 69.93,34.41 68.97,34.41 68.97,35.29 69.93,35.29
  region: 71.25,34.61 70.69,34.61 70.69,35.23 71.25,35.23
  region: 168,93.32 161,93.32 161,95.82 168,95.82
In2.Cu:
  region: 74.56,34.61 71.65,34.61 71.65,35.23 74.56,35.23
  region: 69.93,34.41 68.97,34.41 68.97,35.29 69.93,35.29
  region: 71.25,34.61 70.69,34.61 70.69,35.23 71.25,35.23
  region: 168,93.32 161,93.32 161,95.82 168,95.82
In3.Cu:
  region: 74.56,34.61 71.65,34.61 71.65,35.23 74.56,35.23
  region: 69.93,34.41 68.97,34.41 68.97,35.29 69.93,35.29
  region: 71.25,34.61 70.69,34.61 70.69,35.23 71.25,35.23
  region: 168,93.32 161,93.32 161,95.82 168,95.82
In4.Cu:
  region: 74.56,34.61 71.65,34.61 71.65,35.23 74.56,35.23
  region: 69.93,34.41 68.97,34.41 68.97,35.29 69.93,35.29
  region: 71.25,34.61 70.69,34.61 70.69,35.23 71.25,35.23
  region: 168,93.32 161,93.32 161,95.82 168,95.82
B.Cu:
  region: 168,93.32 161,93.32 161,95.82 168,95.82

## Other copper
F.Cu:
  text "1" at 161.964,94.239 h1.02
In1.Cu:
  text "2" at 162.883,94.235 h1.02
In2.Cu:
  text "3" at 163.895,94.23 h1.02
In3.Cu:
  text "4" at 164.874,94.235 h1.02
In4.Cu:
  text "5" at 165.891,94.233 h1.02
B.Cu:
  text "6" at 166.883,94.233 h1.02

## Silkscreen, mask and mechanical layers (free items; w line width, h text height)
F.SilkS:
  dashed: 136.7,21.62 125,21.62 125,26.42 136.7,26.42
  text "RESET" at 67.489,83.739 h1.02 r90
  text "MCU" at 65.289,77.462 h1.02 r90
  text "P26 LPC_JTAG" at 156.303,71.2 h1.02
  text "DFU" at 67.485,70.982 h1.02 r90
  text "${TITLE}" at 87.461,69.227 h1.78
  text "FPGA" at 65.289,64.677 h1.02 r90
  text "${DATE}" at 109.201,64.427 h1.78
  text "RF" at 65.281,60.457 h1.02 r90
  text "P2" at 177.085,56.457 h1.02 r90
  text "USB" at 65.289,55.711 h1.02 r90
  text "TP6 / GND" at 131.153,54.688 h1.02
  text "P28" at 127.59,52.097 h1.02 r90
  text "RX" at 65.281,51.279 h1.02 r90
  text "P20" at 168.087,50.851 h1.02 r90
  text "TX" at 65.281,46.708 h1.02 r90
  text "P1" at 177.081,38.493 h1.02 r90
  text "P3 / RF" at 64.627,28.863 h1.02 r90
  text "P22" at 152.344,26.784 h1.02
  text "r${VERSION}" at 148.45,21.927 h1.78
Edge.Cuts:
  lines w0.254: 60,24.82 ccw(c64,24.82) 64,20.82 176,20.82 ccw(c176,24.82) 180,24.82 180,26.82 ccw(c178.5,26.82) 179.561,27.881 178.939,28.459 cw(c180,29.52) 178.5,29.52 178.5,36.12 cw(c180,36.12) 178.939,37.181 179.561,37.759 ccw(c178.5,38.82) 180,38.82 180,44.82 ccw(c178.5,44.82) 179.561,45.881 178.939,46.459 cw(c180,47.52) 178.5,47.52 178.5,54.12 cw(c180,54.12) 178.939,55.181 179.561,55.759 ccw(c178.5,56.82) 180,56.82 180,91.82 ccw(c176,91.82) 176,95.82 160,95.82 ccw(c160,93.82) 158,93.82 158,74.32 cw(c157,74.32) 157,73.32 71,73.32 cw(c71,74.32) 70,74.32 70,93.82 ccw(c68,93.82) 68,95.82 64,95.82 ccw(c64,91.82) 60,91.82 60,40.82 ccw(c61.5,40.82) 60.439,39.759 61.061,39.181 cw(c60,38.12) 61.5,38.12 61.5,31.52 cw(c60,31.52) 61.061,30.459 60.439,29.881 ccw(c61.5,28.82) 60,28.82 60,24.82
Cmts.User:
  circle w0.254: c210.5,120.96 r3.25
  circle w0.254: c209.9,160.32 r2
  circle w0.254: c271,166.82 r3
  circle w0.254: c228.5,120.96 r3.25
  circle w0.254: c246.5,121.545 r2
  circle w0.254: c233.622,156.61 r1
  circle w0.254: c201,147.82 r3
  circle w0.254: c271,147.82 r3
  circle w0.254: c238.194,156.61 r1
  circle w0.254: c201,166.82 r3
  circle w0.254: c242.766,156.61 r1
  circle w0.254: c247.338,156.61 r1
  circle w0.254: c222.9,160.32 r2
  circle w0.254: c252.5,121.545 r2
  circle w0.254: c249.5,121.545 r2
  circle w0.254: c259.5,156.96 r3.25
  circle w0.254: c229.05,156.61 r1
  circle w0.254: c216.4,156.61 r1
  circle w0.254: c271,130.82 r3
  circle w0.254: c271,111.82 r3
  circle w0.254: c201,111.82 r3
  circle w0.254: c201,130.82 r3
  lines w0.254: 61.7,27.82 61.7,88.82 ; 62,27.82 64,27.82 cw(c64,24.82) 67,24.82 ; 62,88.82 64,88.82 ccw(c64,91.82) 67,91.82 ; 67,24.32 173,24.32 ; 67,92.32 173,92.32 ; 173,24.82 cw(c176,24.82) 176,27.82 178,27.82 ; 173,91.82 ccw(c176,91.82) 176,88.82 178,88.82 ; 178.3,27.82 178.3,88.82 ; 198,118.51 204,118.51 ; 198,120.51 204,120.51 ; 198,154.51 204,154.51 ; 198,156.51 204,156.51 ; 198.5,117.32 198.5,121.82 ; 198.5,153.32 198.5,157.82 ; 199,118.71 205,118.71 ; 199,120.31 205,120.31 ; 199,154.71 205,154.71 ; 199,156.31 205,156.31 ; 205,120.96 234,120.96 ; 205.5,160.32 226.5,160.32 ; 207.755,116.82 207.755,124.82 ; 209.9,152.82 209.9,163.82 ; 210.5,114.82 210.5,127.82 ; 213,156.61 250,156.61 ; 213.245,116.82 213.245,124.82 ; 216.4,152.82 216.4,161.82 ; 222.9,152.82 222.9,163.82 ; 225.755,116.82 225.755,124.82 ; 228.5,114.82 228.5,127.82 ; 229.05,152.82 229.05,161.82 ; 231.245,116.82 231.245,124.82 ; 233.622,152.82 233.622,161.82 ; 238.194,152.82 238.194,161.82 ; 242.766,152.82 242.766,161.82 ; 243.5,121.545 255.5,121.545 ; 246.5,118.045 246.5,125.045 ; 246.5,119.545 252.5,119.545 ; 246.5,123.545 252.5,123.545 ; 247.338,152.82 247.338,161.82 ; 249.5,114.82 249.5,127.82 ; 252.5,118.045 252.5,125.045 ; 256,156.96 263,156.96 ; 256.755,152.82 256.755,160.82 ; 259.5,152.82 259.5,163.82 ; 262.245,152.82 262.245,160.82 ; 197,166.82 cw(c201,166.82) 201,170.82 ; 197,166.82 cw(c201,166.82) 201,170.82 ; 197,166.82 197,147.82 ccw(c201,147.82) 201,143.82 271,143.82 ccw(c271,147.82) 275,147.82 275,166.82 ccw(c271,166.82) 271,170.82 201,170.82 ; 271,107.82 ccw(c271,111.82) 275,111.82 ; 271,107.82 ccw(c271,111.82) 275,111.82 ; 271,107.82 201,107.82 cw(c201,111.82) 197,111.82 197,130.82 cw(c201,130.82) 201,134.82 271,134.82 cw(c271,130.82) 275,130.82 275,111.82
  text "end plate templates for optional Hammond 1455J1201 enclosure" at 220.16,176.061 h2
  text "RESET" at 208.895,147.394 h1.5
  text "3V3" at 215.816,147.393 h1.5
  text "DFU" at 222.254,147.399 h1.5
  text "1V8" at 228.506,147.393 h1.5
  text "RF" at 233.266,147.405 h1.5
  text "LED1" at 237.41,147.405 h1.5
  text "RX" at 242.36,147.405 h1.5
  text "TX" at 246.934,147.405 h1.5
  text "ANTENNA" at 257.869,147.402 h1.5
  text "front end plate" at 232.359,140.061 h2
  text "CLKIN" at 209.552,111.394 h1.5
  text "CLKOUT" at 227.193,111.394 h1.5
  text "USB" at 248.888,111.394 h1.5
  text "rear end plate" at 232.565,104.068 h2